# EAGLE board BrainA2-B-11Nov2016 (EAGLE 8.6.0)
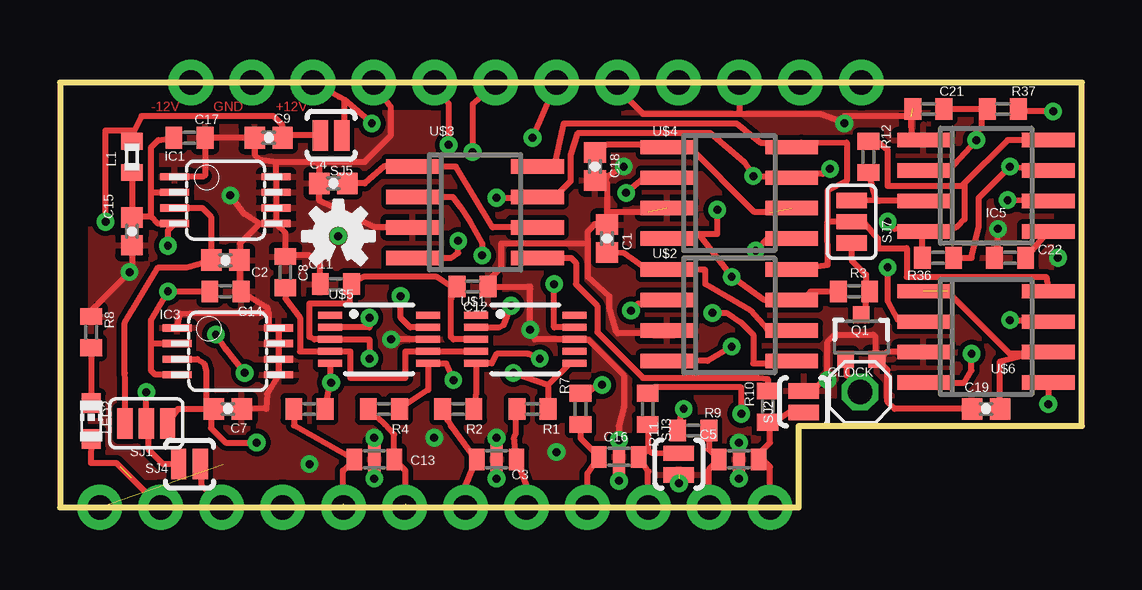
[diagram p0: board, top side]
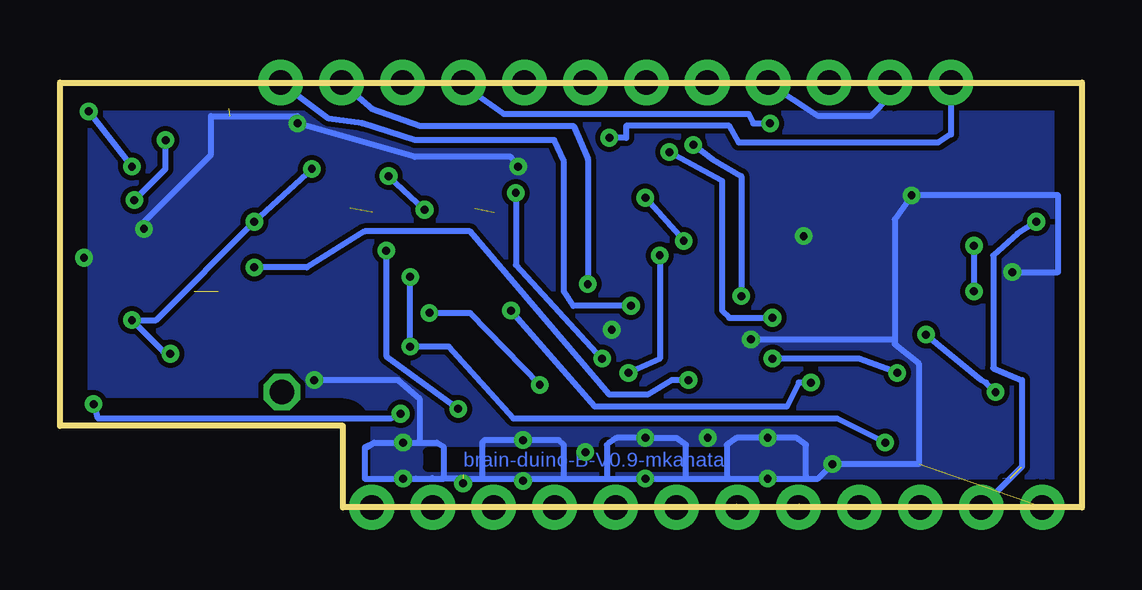
[diagram p1: board, bottom side, seen from below]

Size 42.6 x 17.7 mm. Coordinates in mm from the lower left corner, seen from the top.
Outline: 0,17.7 0,0 30.8,0 30.8,3.4 42.6,3.4 42.6,17.7 0,17.7
Copper layers (1*16): Top 0.035mm / dielectric 1.5mm / Bottom 0.035mm
Design rules "default *": minimum track width 10mil, minimum drill 20mil, track to track 8mil, track to pad 8mil, pad to pad 8mil, via to via 8mil, smd to smd 8mil, copper to edge 40mil, drill to drill 8mil, minimum pad ring 10mil, minimum via ring 8mil, stop-mask expansion 4mil, vias tented up to drill 0mil, thermal gap 10mil
Net classes: 0 default: clearance 0.205 mm

## Footprints (pad centres in the part's own frame; a part is rotated, then mirrored left to right if it is on the bottom)
0402-CAP = smd 0.85 x 0.9: 1 -0.58,0; 2 0.58,0
C0603 = smd 0.64 x 0.89: 1 -0.83,0; 2 0.83,0 | smd 0.51 x 1.52: GND 0,0
C0402 = smd 0.7 x 0.9: 1 -0.65,0; 2 0.65,0
1X01 = drill 1.016 octagon: 1 0,0
MSOP08 = smd 0.3 x 1.2: 1 -0.976,-2.113; 2 -0.326,-2.113; 3 0.324,-2.113; 4 0.974,-2.113; 5 0.974,2.112; 6 0.324,2.112; 7 -0.326,2.112; 8 -0.976,2.112
SO08 = smd 0.6 x 2.2: 1 -1.905,-2.6; 2 -0.635,-2.6; 3 0.635,-2.6; 4 1.905,-2.6; 5 1.905,2.6; 6 0.635,2.6; 7 -0.635,2.6; 8 -1.905,2.6
1X12_NO_SILK = drill 1.016 pad 1.88: 1 0,0; 2 2.54,0; 3 5.08,0; 4 7.62,0; 5 10.16,0; 6 12.7,0; 7 15.24,0; 8 17.78,0; 9 20.32,0; 10 22.86,0; 11 25.4,0; 12 27.94,0
0402 = smd 0.7 x 0.9: 1 -0.65,0; 2 0.65,0
CHIP-LED0603 = smd 0.8 x 0.8: A 0,-0.75; C 0,0.75
SOT323 = smd 0.7 x 0.7: 1 -0.65,-0.925; 2 0.65,-0.925; 3 0,0.925
R0402 = smd 0.7 x 0.9: 1 -0.65,0; 2 0.65,0
SJ_3 = smd 0.635 x 1.27: 1 -0.889,0; 2 0,0; 3 0.889,0
SJ_2S-NO = smd 0.635 x 1.27: 1 -0.45,0; 2 0.45,0
MSOP10 = smd 0.3 x 1: 1 -1,-2.05; 2 -0.5,-2.05; 3 0,-2.05; 4 0.5,-2.05; 5 1,-2.05; 6 1,2.05; 7 0.5,2.05; 8 0,2.05; 9 -0.5,2.05; 10 -1,2.05
MAX7480 = smd 0.6 x 2.2: 1 -1.905,-2.6; 2 -0.635,-2.6; 3 0.635,-2.6; 4 1.905,-2.6; 5 1.905,2.6; 6 0.635,2.6; 7 -0.635,2.6; 8 -1.905,2.6

## Placement (x,y rotation side)
C1  0.1µF  [0402-CAP]  22.8,11.2 270 top
C2  4.7µF  [0402-CAP]  6.9,10.3 180 top
C3  [C0603]  18.2,2 180 top
C4  0.1µF  [0402-CAP]  11.4,13.5 0 top
C5  [C0603]  28.3,2 0 top
C7  4.7µF  [0402-CAP]  7,4.1 0 top
C8  2.2uF  [C0402]  9.4,9.8 270 top
C9  2.2µF  [0402-CAP]  8.7,15.4 0 top
C11  2.2uF  [C0402]  11.5,9.3 0 top
C12  2.2uF  [C0402]  17.2,9.2 180 top
C13  [C0603]  13.1,2 180 top
C14  2.2uF  [C0402]  6.9,9 180 top
C15  2.2µF  [0402-CAP]  3,11.5 90 top
C16  [C0603]  23.3,2.1 0 top
C17  2.2uF  [C0402]  5.4,15.4 180 top
C18  0.1µF  [0402-CAP]  22.3,14.2 90 top
C19  0.1µF  [0402-CAP]  38.6,4.1 0 top
C21  2.2nF  [C0402]  36.2,16.6 0 top
C22  0.1µF  [C0402]  39.6,10.4 0 top
CLOCK  [1X01]  33.35,4.8 0 top
FRAME1  FRAME-LETTER  [CREATIVE_COMMONS]  -4.3,-10.2 0 top  (outside the outline)
IC1  ADP1720ARMZ-3.3  [MSOP08]  6.9,12.8 270 top
IC3  ADP1720ARMZ-5  [MSOP08]  7,6.5 270 top
IC5  TLC555CDR  [SO08]  38.6,13.4 270 top
JP1  [1X12_NO_SILK]  29.6,0 180 top
JP2  [1X12_NO_SILK]  33.4,17.7 180 top
L1  BLM15HB121SN1  [0402]  3,14.6 270 top
LED2  [CHIP-LED0603]  1.3,3.6 0 top
Q1  MOSFET-NCHANNEL2N7002PW  [SOT323]  33.4,7.1 0 top
R1  4.7K  [R0402]  19.7,4.1 180 top
R2  4.7K  [R0402]  16.6,4.1 180 top
R3  10k  [R0402]  33.1,9 180 top
R4  4.7K  [R0402]  13.5,4.1 180 top
R5  4.7K  [R0402]  10.4,4.1 180 top
R7  470  [R0402]  21.7,4.1 270 top
R8  20k  [R0402]  1.3,7.3 90 top
R9  470  [R0402]  26.4,3.2 0 top
R10  470  [R0402]  29.5,4.2 270 top
R11  470  [R0402]  24.5,4.1 270 top
R12  10K  [R0402]  33.7,14.6 90 top
R36  1K  [R0402]  36.6,10.4 180 top
R37  100K  [R0402]  39.3,16.6 0 top
SJ1  [SJ_3]  3.6,3.5 180 top
SJ2  SOLDERJUMPERNO  [SJ_2S-NO]  31,4.4 90 top
SJ3  SOLDERJUMPERNO  [SJ_2S-NO]  25.8,1.8 270 top
SJ4  SOLDERJUMPERNO  [SJ_2S-NO]  5.4,1.8 180 top
SJ5  SOLDERJUMPERNO  [SJ_2S-NO]  11.3,15.5 180 top
SJ7  [SJ_3]  33,11.9 270 top
U$1  AD8475  [MSOP10]  19.4,7 270 top
U$2  MAX7480ESA+  [MAX7480]  27.9,8 270 top
U$3  MAX7480ESA+  [MAX7480]  17.3,12.3 270 top
U$4  MAX7480ESA+  [MAX7480]  27.9,13.1 270 top
U$5  AD8475  [MSOP10]  13.3,7 270 top
U$6  MAX7480ESA+  [MAX7480]  38.6,7.1 270 top
U$8  [OSHW-LOGO-S]  11.6,11.3 0 top

## Library data of the parts
C1 C2 C4 C7 C9 C15 C18 C19 = SparkFun-Capacitors
C3 C5 C13 C16 IC1 IC3 = AD7173
C8 C11 C12 C14 C17 C21 C22 R1-R5 R7-R12 R36 R37 = rcl
CLOCK = pinhead
FRAME1 U$8 = SparkFun-Aesthetics
IC5 = linear
JP1 JP2 = SparkFun-Connectors
L1 = inductors
LED2 = led
Q1 = SparkFun-DiscreteSemi; PROD_ID: TRANS-11151
SJ1-SJ5 SJ7 = SparkFun-Retired
U$1-U$6 = MKH

## Nets
5V: C7.1 IC3.3 IC5.4 IC5.8 R3.2 R12.2 R36.2 SJ1.1 U$2.4 U$2.7 U$3.4 U$3.7 U$4.4 U$4.7 U$6.4 U$6.7
+12V: JP2.4 JP2.10 SJ5.1
-12V: JP2.6 JP2.12
GND: C1.1 C2.1 C3.GND C4.1 C5.GND C7.2 C8.1 C9.1 C11.1 C12.1 C13.GND C14.1 C15.1 C16.GND C17.1 C18.1 C19.1 C21.1 C22.1 IC1.1 IC1.5 IC1.6 IC1.7 IC1.8 IC3.1 IC3.5 IC3.6 IC3.7 IC3.8 IC5.1 JP1.12 JP2.3 JP2.5 JP2.9 JP2.11 Q1.2 R8.2 SJ2.2 SJ3.2 U$1.8 U$2.3 U$3.3 U$4.3 U$5.8 U$6.3
N$2: C13.2 JP1.8 R5.2
N$6: C1.2 U$2.1 U$2.6
N$10: R11.1 U$6.5
N$11: JP2.1 U$1.2
N$13: R7.1 U$2.5
N$14: JP2.2 U$1.9
N$15: C3.2 JP1.6 R2.2
N$16: C3.1 JP1.5 R1.2
N$18: C5.2 JP1.1 R10.2 SJ2.1
N$19: R2.1 U$1.5 U$4.2
N$21: C4.2 U$3.1 U$3.6
N$22: Q1.3 R3.1 SJ7.3
N$25: JP1.10 SJ4.1
N$26: R10.1 U$3.5
N$28: C8.2 U$1.4 U$5.4
N$29: LED2.C R8.1
N$30: R4.1 U$5.6 U$6.2
N$31: JP2.8 U$5.9
N$33: C13.1 JP1.7 R4.2
N$35: JP2.7 U$5.2
N$38: C5.1 JP1.2 R9.2
N$39: C18.2 U$4.1 U$4.6
N$43: C14.2 C15.2 C17.2 IC1.2 IC1.4 IC3.2 IC3.4 L1.2
N$46: R9.1 U$4.5
N$50: CLOCK.1 Q1.1
N$53: R5.1 U$2.2 U$5.5
N$55: R1.1 U$1.6 U$3.2
N$58: IC5.3 R12.1 SJ7.1
N$61: C16.1 JP1.4 R7.2
N$63: C2.2 IC1.3 SJ1.3
N$65: C16.2 JP1.3 R11.2 SJ3.1
N$67: C19.2 U$6.1 U$6.6
N$69: SJ7.2 U$2.8 U$3.8 U$4.8 U$6.8
N$78: IC5.7 R36.1 R37.2
N$80: C21.2 IC5.2 IC5.6 R37.1
N$83: C22.2 IC5.5
V+: C9.2 JP1.11 L1.1 LED2.A SJ5.2
VCCIO: C11.2 C12.2 SJ1.2 SJ4.2 U$1.3 U$5.3

## Tracks (layer width: path | path; a pad name or v marks a point on that pad's centre or on a via)
5V  (via drill 0.33)
  Top 0.254: v28,6.7 27,6.1 26.1,6.1 U$2.4 | v27.4,12.4 27.4,11.4 25.8,11.4 U$4.4 26.6,11.4 v28,9.6 29.37,8.63 U$2.7 30.93,8.6 31,8.6 31.3,9 | C7.1 6.3,3.9 | 6.3,3.9 6.2,3.8 6.2,3.9 6.1,4 | IC3.3 5.72,6.18 6,6 6.1,5.7 6.1,4.42 C7.1 | 6.32,4 C7.1 | 6.3,3.9 6.3,3.3 6.9,2.7 v8.2,2.7 | SJ1.1 4.92,4.1 C7.1 | U$3.4 16.3,10.4 16.6,10.6 v16.6,11.1 | v18.2,12.9 19.87,12.9 U$3.7 20.63,12.94 21.3,13.6 21.3,14.7 21.6,15.6 27.1,15.6 28.5,14.4 v28.9,13.8 30.93,13.8 U$4.7 30.93,13.9 31.8,13.9 v32.1,14.1 | IC5.4 35.9,11.5 34.8,11.6 v34.5,11.9 | IC5.4 36.99,11.5 37.4,11.7 37.7,12 37.7,13.5 | R36.2 35.95,11.25 IC5.4 | IC5.8 39.51,15.3 37.7,13.5 | U$6.4 37.7,5.2 38,5.7 v38,6.4 | v39.6,7.8 41.13,7.8 U$6.7 | 31.4,8.95 31.35,8.95 31.3,9 | 31.3,9 R3.2 | R12.2 34.05,15.25 34.5,14.9 34.5,13.4 37.6,13.4 37.7,13.5
  Bottom 0.254: v28,9.6 v28,6.7 26.4,6.7 23.7,3.7 10.2,3.7 v8.2,2.7 | v27.4,12.4 v28.9,13.8 | v16.6,11.1 v18.2,12.9 | v32.1,14.1 v34.5,11.9 38.6,7.8 v39.6,7.8 38.3,6.5 v38,6.4
+12V  (via drill 0.33)
  Top 0.254: v13,16 11.86,16.98 | 11.86,16.98 11.64,17.1 JP2.10 | SJ5.1 11.86,15.5 11.86,16.98
  Bottom 0.254: JP2.4 25.78,17.58 24.1,16.4 13.9,16.4 13.7,16 v13,16
-12V  (via drill 0.33)
  Top 0.254: v19.7,15.4 JP2.6
  Bottom 0.254: v19.7,15.4 19,15.4 19,15.9 14.7,15.9 14.3,15.2 6,15.2 5.46,15.54 JP2.12
GND  (via drill 0.33)  (4 unrouted)
  Top 0.254: 25.85,12.52 U$4.3 | 22.68,12 C1.1 | C1.1 22.8,13.52 C18.1 22.78,13.7 22.8,13.8 v23.5,14.2 | U$5.8 v13.8,7 | 19.6,9.1 v19.6,7.4 19.6,7.2 19.8,7 U$1.8 22,7 23.5,5.5 23.5,4.2 23.3,3.4 v23.3,2.8 | 19.6,9.1 19.6,9.2 C12.1 | C13.GND v13.1,1.2 | C3.GND v18.2,1.2 | 24.5,12.3 22.82,12.3 C1.1 | 6.05,13.83 C17.1 C9.1 8.12,14.68 8.3,14.5 9,14.4 | IC1.8 IC1.7 IC1.6 IC1.5 | IC1.5 8.33,11.83 | 8.33,11.83 7.5,11 7.5,10.32 C2.1 7.48,9.07 C14.1 8.65,8.33 8.7,7.48 | IC3.1 5,8.08 5.8,8.1 8.7,8.1 8.7,7.48 | 8.7,7.48 IC3.8 IC3.7 IC3.6 IC3.5 8.63,4.73 8.6,4.1 7.7,4.12 C7.2 | C15.1 3,10 v2.9,9.8 1.3,8.2 | IC1.5 9.4,11.44 C8.1 9.45,10.5 10.4,10.5 10.85,10.05 C11.1 | 22,11 22,9.6 22.9,8.8 22.9,8.3 23.2,7.3 23.25,7.25 24.78,7.25 | 22,11 22,11.5 22.3,11.8 22.78,11.8 C1.1 | 9,14.4 10.6,14.4 | 10.6,14.4 12.7,14.4 13.8,15.5 13.8,16.68 JP2.9 13.1,17.58 | 8.33,11.83 7.67,12.23 v7.1,13 | 10.6,14.4 10.82,14.28 C4.1 10.8,13.48 10.8,12.8 13.13,11.66 U$3.3 | v28.3,1.2 C5.GND | SJ3.2 25.8,1.4 26.25,1.4 | C12.1 17.85,9.45 18.4,10 18.4,11 22,11 | C12.1 19.5,9.2 19.6,9.1 | JP2.5 23.24,17.46 24.3,16.4 28.3,16.4 | 28.3,16.4 31.7,16.4 32.8,16 32.7,16.1 v32.7,16 32.7,16.3 35.5,16.3 35.51,15.3 IC5.1 36.25,15.26 | JP2.3 28.32,16.52 28.3,16.4 | SJ2.2 31.55,5.05 32,5.5 | v32,5.3 32,5.5 | 32,5.5 32,6.9 32.3,7.2 33.9,7.2 34,7.1 34,6.23 Q1.2 | Q1.2 34.18,6.18 34.5,6.5 35.96,6.5 U$6.3 | C19.1 34.8,4.1 34.5,4.4 34.5,5.73 Q1.2 | 39.1,10.5 v39.1,11.6 | 9,13.7 9,14.4
  Top 0.406: 24.78,7.25 25.58,7.25 U$2.3
  Bottom 0.254: JP2.11 8,17.1 8.8,16.3 11,16.3 13.1,17.68 JP2.9 | 25.8,1.2 27.08,1.22 27.76,1.2 | 27.76,1.2 26.6,1.2 | 25.8,1.2 25,1.2 | 25,1.2 v18.2,1.2 16.5,1.2 | 16.5,1.2 14.8,1.2 | 14.8,1.2 v13.1,1.2 11,1.2 v10.4,1.8 6.8,1.8 6.8,6 7.8,6.8 7.8,7 | 27.76,1.2 v28.3,1.2 29.9,1.2 29.9,2.5 | 14.8,1.2 14.8,2.6 14.4,2.9 v13.1,2.9 11.9,2.9 11.5,2.6 11.5,1.3 | 16.5,1.2 16.5,2.6 16.9,2.9 v18.2,2.9 19.4,2.9 19.7,2.7 | 1.01,13.01 1,13 | 1,13 v7.1,13 7.8,12 7.8,7 | 1,13 1,9.8 v2.9,9.8 | v13.8,7 7.8,7 | 21.6,1.2 21.6,2.6 21.8,2.8 24.9,2.8 25,2.7 25,1.2 | 25.8,1.2 26.6,1.2 | 26.6,1.2 26.6,2.5 26.9,2.7 v28.3,2.7 29.5,2.7 | 29.5,2.7 29.9,2.5 | v23.5,14.2 23.8,14.6 27.8,14.6 v32.7,16 32.7,16.3 36.3,16.3 36.3,14.7 39.1,11.9 v39.1,11.6 | 27.6,2.7 27.6,4.5 28.5,5.3 v32,5.3 | 29.9,2.5 29.8,2.5 29.5,2.7
  other vias: 11.6,11.3 20.7,2.3 15.6,2.9 25.8,1 23.3,1.1 41.6,10.4
  pour Top: 0,17.7 42.6,17.7 42.6,3.4 30.8,3.4 30.8,0 0,0
  pour Bottom: 0,17.7 42.6,17.7 42.6,3.4 30.8,3.4 30.8,0 0,0
N$2  (1 unrouted)
  Top 0.254: R5.2 9.75,3.42 C13.2 | C13.2 12.27,1.67 | 11.8,0.16 11.8,1.53 C13.2
N$6
  Top 0.254: U$2.6 30.3,7.42 29.48,7.42 28.8,8.2 26.9,9.3 26.9,9.9 26.3,9.9 26.2,10 25.8,10 U$2.1 25.7,9.9 24.5,9.9 23.5,10.6 C1.2
N$10  (via drill 0.33)
  Top 0.254: U$6.5 v41.2,4.3 | v28.4,3.9 28.4,5 24.75,5 R11.1
  Bottom 0.254: v28.4,3.9 28.8,3.7 41,3.7 v41.2,4.3
N$11  (via drill 0.33)
  Top 0.254: U$1.2 18.3,7.5 18.5,7.6 v18.8,8.4
  Bottom 0.254: v18.8,8.4 21.2,8.4 21.6,9 21.6,14.4 22,15.3 27.8,15.3 30,16 31.4,16.2 JP2.1
N$13  (via drill 0.33)
  Top 0.254: v27.2,8.1 27.8,8.1 28.4,7.7 28.9,7.2 28.9,6 30.8,6 U$2.5 | R7.1 22,4.8 22.4,5.1 v22.6,5.1
  Bottom 0.254: v27.2,8.1 25.5,8.1 v22.6,5.1
N$14  (via drill 0.33)
  Top 0.254: U$1.9 20.6,7.5 v20.6,9.3
  Bottom 0.254: JP2.2 29.6,16.6 27.6,15.9 21.2,15.9 20.6,14.5 v20.6,9.3
N$15
  Top 0.254: R2.2 16.15,3.65 16.3,3.4 17.2,2.17 C3.2 16.92,0.95 16.9,0.93 JP1.6
N$16
  Top 0.254: 18.9,1.93 C3.1 | C3.1 19.46,0.87 19.44,0.85 JP1.5 | C3.1 18.93,2.93 19,3.1 19,3.6 R1.2
N$18
  Top 0.254: C5.2 29.13,2.23 29.6,2.7 29.6,3.45 | 29.6,3.45 R10.2 | 29.6,3.45 30.5,4.05 SJ2.1 | JP1.1 29.6,1.69 29.29,2
  Top 0.305: C5.2 29.29,2
N$19  (via drill 0.33)
  Top 0.254: R2.1 17.35,4.8 U$1.5 18,6 18.2,6.4 19.5,6.4 v20,6.2 | v23.6,13.1 24.3,13.7 24.34,13.73 U$4.2
  Bottom 0.254: v23.6,13.1 23.6,10.1 v20,6.2
N$20
  Top 0.254: 5.3,13.8 6,13.8
N$21
  Top 0.254: C4.2 12.7,13.5 13.5,14.2 U$3.1 15.7,14.2 16.5,14.2 18.03,11.66 U$3.6
N$22
  Top 0.254: SJ7.3 33,10.3 33.6,9.7 33.6,9.05 R3.1 33.6,8.95 33.6,8.3 Q1.3
N$25
  Top 0.254: SJ4.1 5.89,0.95 6.74,0.1 JP1.10
N$26
  Top 0.254: U$3.5 21.3,10.4 21.5,10.2 21.5,9.3 22.4,8.4 22.4,7.3 24.3,5.4 29.1,5.4 29.5,5.35 R10.1
N$28
  Top 0.254: U$1.4 14.4,6.5 14.4,5.4 12.1,5.4 12.1,6.5 U$5.4 10,6.5 10,7.9 9.4,8.7 C8.2
N$29
  Top 0.254: R8.1 LED2.C
N$30  (via drill 0.33)
  Top 0.254: R4.1 15.35,4.9 U$5.6 16.1,6 v16.4,5.3 | v34.5,10 34.5,8.6 34.93,7.8 U$6.2
  Bottom 0.254: v16.4,5.3 17.1,5.3 18.1,4.7 19.7,4.7 25.5,11.5 29.9,11.5 32.3,10 v34.5,10
N$31  (via drill 0.33)
  Top 0.254: v16.2,15.1 16.2,16.8 JP2.8 | U$5.9 14.6,7.5 14.2,7.9 v14.2,8.8
  Bottom 0.254: v16.2,15.1 15.4,14.5 14.2,13.8 v14.2,8.8
N$33  (1 unrouted)
  Top 0.254: C13.1 13.93,3.03 13.55,3.45 R4.2 | C13.1 13.93,1.87 | 14.4,0.16 14.4,1.53 C13.1
N$35  (via drill 0.33)
  Top 0.254: v12.9,7.9 12.9,7.5 U$5.2 | JP2.7 17.2,16.8 v17.2,14.8
  Bottom 0.254: v17.2,14.8 15,13.6 15,8.2 14.7,7.9 v12.9,7.9
N$38
  Top 0.254: JP1.2 27.06,1.59 C5.1 27.05,2.42 R9.2
N$39  (1 unrouted)
  Top 0.254: C18.2 22.77,15.11 24.3,15.1 24.3,15.01 U$4.1 26.08,15.02 26.16,15.1 28.96,12.3 29.6,12.3
N$43  (via drill 0.33)
  Top 0.254: IC1.2 4.79,13.11 4.8,13.1 3.8,13.1 | 3.8,12.1 4.07,11.83 IC1.4 4.5,11.54 v4.5,10.9 | 3.8,12.1 3.8,13.1 | 3.8,13.1 3.8,15 4.1,15.3 C17.2 | IC3.4 3.97,5.53 3.8,5.7 3.8,6.9 | 3.8,6.9 3.8,7.8 v4.5,9 C14.2 | IC3.2 3.87,6.83 3.8,6.9 | L1.2 C15.2 3.32,12.1 3.8,12.1
  Bottom 0.254: v4.5,10.9 v4.5,9
N$46  (via drill 0.33)
  Top 0.254: U$4.5 29.89,11.3 29.59,11.3 v29,10.7 | v26,4.1 25.9,4.05 R9.1
  Bottom 0.254: v29,10.7 29,6.3 v26,4.1
N$50
  Top 0.254: 32.7,6 32.62,6.08 Q1.1 32.8,6.12 32.8,5.5 33.35,4.95 CLOCK.1
N$53  (via drill 0.33)
  Top 0.254: v23.8,8.2 24.1,8.5 25.56,8.5 U$2.2 | U$5.5 11.25,5.45 v11.3,5.2 11.25,5.15 R5.1
  Bottom 0.254: v11.3,5.2 11.8,5.2 12.3,4.2 20.3,4.2 v23.8,8.2
N$54
  Bottom 0.254: 19.8,2.6 19.8,1.2
N$55  (via drill 0.33)
  Top 0.254: 20.35,5.1 R1.1 | U$3.2 16.37,12.94 16.7,12.5 17.1,11.9 17.6,11 v17.6,10.5 | v18.9,5.6 20.35,5.1 | U$1.6 21.25,6 20.35,5.1
  Bottom 0.254: v17.6,10.5 17.6,6.2 v18.9,5.6
N$58
  Top 0.254: IC5.3 34.18,12.77 34.1,12.77 | 34.1,12.77 SJ7.1 | R12.1 34,12.87 34.1,12.77
N$61
  Top 0.254: R7.2 21.7,2.87 C16.1 22,1.43 21.98,1.41 JP1.4
N$63
  Top 0.254: SJ1.3 2.71,5.31 2.7,5.6 2.7,7.7 4.1,10 5.3,10 C2.2 6.3,10.32 6.3,12.1 5.92,12.48 IC1.3
N$65
  Top 0.254: R11.2 24.5,2.37 | 24.5,2.37 C16.2 24.54,1.49 24.52,1.47 JP1.3 | 24.5,2.37 24.68,2.27 SJ3.1
N$67  (1 unrouted)
  Top 0.254: 40.4,6.4 41.73,6.4 U$6.6 | C19.2 39.18,6.08 40.4,6.4 | 40.4,6.4 39.6,6.4 37,9
N$69
  Top 0.254: U$3.8 20.6,14.2 21,16 28.2,16 29.2,15.2 30.89,15.2 U$4.8 30.89,15.2 32.8,15.2 32.8,13.6 32,13.2 32,11.9 | U$2.8 32.01,10.11 32,11.9 | U$6.8 41.1,9.6 35.3,9.6 35.3,10.8 34.1,10.8 34.1,11.2 33.5,11.9 SJ7.2 32,11.9
N$78  (via drill 0.33)
  Top 0.254: 41.26,14.1 IC5.7 41.13,14.1 v39.6,14.2 38.3,12.9 38.3,11.7 38,10.4 R36.1 | v41.4,16.5 39.95,16.5 R37.2
  Bottom 0.254: v39.6,14.2 v41.4,16.5
N$80  (via drill 0.33)
  Top 0.254: IC5.2 37.04,14.04 v38.2,15.3 38.2,15.7 38.4,15.8 38.4,16.6 R37.1 C21.2 | IC5.6 40.34,12.77 v39.5,12.8
  Bottom 0.254: v39.5,12.8 38.2,14.1 v38.2,15.3
N$83
  Top 0.254: C22.2 40.51,10.7 IC5.5
V+  (via drill 0.33)  (1 unrouted)
  Top 0.254: 3.1,15.7 1.9,15.7 v1.9,11.9 | 3.1,15.7 3.4,16.3 8.9,16.3 9.28,15.92 C9.2 9.28,15.5 SJ5.2 | L1.1 3,15.6 3.1,15.7 | LED2.A 1.29,1.85 2.35,1.85 JP1.11
  Bottom 0: 2.98,1.22 3.3,1.2
  Bottom 0.254: v1.9,11.9 2.7,11.4 3.7,10.5 3.7,5.8 2.5,5.3 2.5,1.7 JP1.11
VCCIO  (via drill 0.33)
  Top 0.254: U$1.3 16.4,7 16.3,7.1 16.3,8.6 | 16.3,8.6 16.35,8.8 C12.2 | v12.9,6.2 12.9,7 U$5.3 10.6,7 10.4,7.1 10.4,8.5 12.1,8.5 12.1,9.1 C11.2 12.65,9.6 15.7,9.6 16.3,9.2 16.3,8.6 | v7.7,5.6 6.9,6.6 v6.5,7.2 | v3.6,4.8 SJ1.2 3.7,2.95 3.7,2.4 4.3,1.8 SJ4.2
  Bottom 0.254: v7.7,5.6 9.3,6.2 v12.9,6.2 | v6.5,7.2 4.2,5.3 4,5.2 v3.6,4.8

## Text on the board
Top: -12V | GND | +12V
Bottom: brain-duino-B-V0.9-mkahata